# EAGLE board řídicí deska (EAGLE 9.5.1)
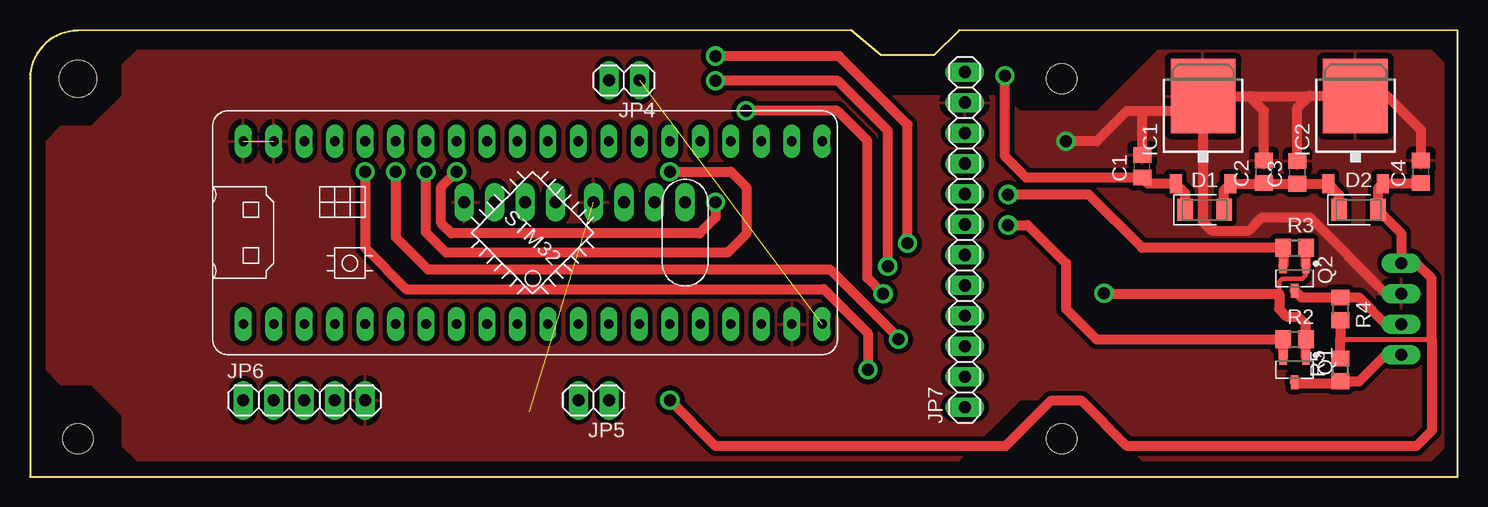
[diagram p0: board, top side]
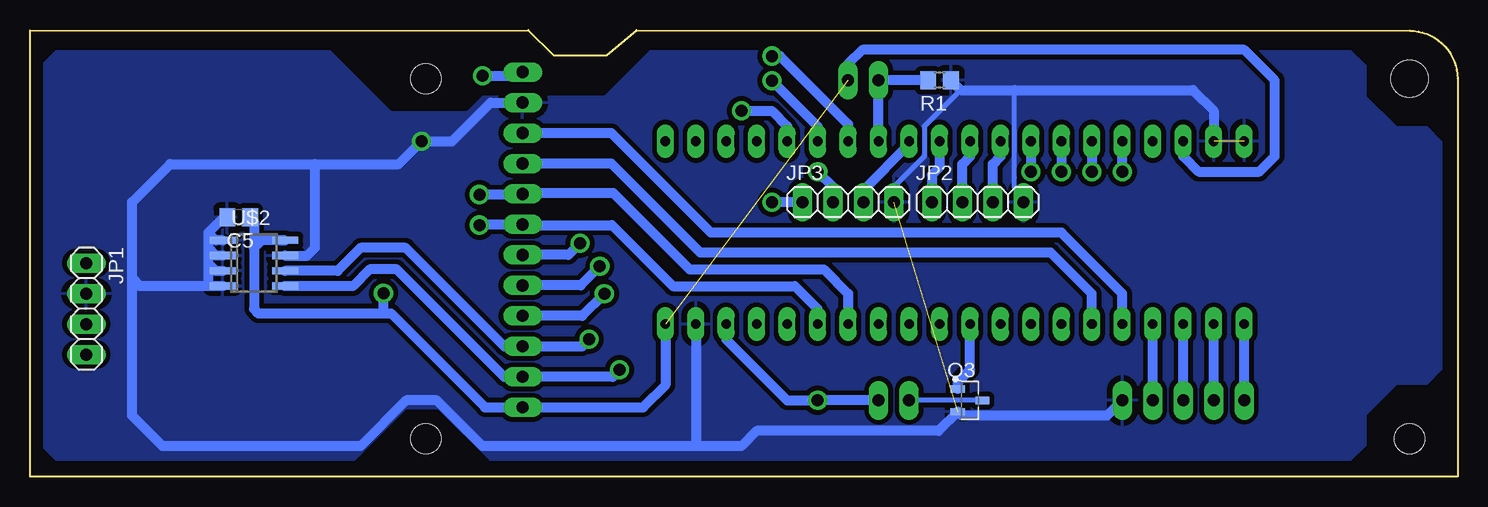
[diagram p1: board, bottom side, seen from below]

Size 119 x 37.21 mm. Coordinates in mm from the lower left corner, seen from the top.
Outline: 4,37.15 arc90 0,33.15 0,0 119,0 119,37.15 77.47,37.21 75.37,35.12 70.93,35.12 68.45,37.21 4,37.15
Copper layers (1*16): Top 0.035mm / dielectric 1.5mm / Bottom 0.035mm
Design rules "SPS_Trutnov_F14": minimum track width 0.3mm, minimum drill 0.6mm, track to track 8mil, track to pad 0.2mm, pad to pad 0.2mm, via to via 0.2mm, smd to smd 0mil, copper to edge 1mm, drill to drill 0.6mm, minimum pad ring 0.3mm, minimum via ring 0.3mm, stop-mask expansion 0.1mm, vias tented up to drill 3mm, thermal gap 20mil
Holes 3.1 mm at 4,33.15
Holes 2.5 mm at 86,33.15 86,3.15 4,3.15

## Footprints (pad centres in the part's own frame; a part is rotated, then mirrored left to right if it is on the bottom)
C0805 = smd 1.3 x 1.5: 1 -0.95,0; 2 0.95,0
DIOMELF3516 = smd 1.275 x 1.85: 1 -1.62,0; 2 1.62,0
DPACK_3 = smd 1 x 1.6: 1 -2.28,-4.8; 3 2.28,-4.8 | smd 5.4 x 6.2: 4 0,2.5
1X04 = drill 1.016 long: 1 -3.81,0; 2 -1.27,0; 3 1.27,0; 4 3.81,0
1X02 = drill 1.016 long: 1 -1.27,0; 2 1.27,0
1X05 = drill 1.016 long: 1 -5.08,0; 2 -2.54,0; 3 0,0; 4 2.54,0; 5 5.08,0
1X12 = drill 1.016 long: 1 -13.97,0; 2 -11.43,0; 3 -8.89,0; 4 -6.35,0; 5 -3.81,0; 6 -1.27,0; 7 1.27,0; 8 3.81,0; 9 6.35,0; 10 8.89,0; 11 11.43,0; 12 13.97,0
SOT95P240X110-3N = smd 1.182 x 0.612: 1 -1.025,0.95; 2 -1.025,-0.95; 3 1.025,0
R0805 = smd 1.3 x 1.5: 1 -0.95,0; 2 0.95,0
BLUE_PILL = drill 0.8 long: P$1 -7.62,15.24; P$2 -7.62,12.7; P$3 -7.62,10.16; P$4 -7.62,7.62; P$5 -7.62,5.08; P$6 -7.62,2.54; P$7 -7.62,0; P$8 -7.62,-2.54; P$9 -7.62,-5.08; P$10 -7.62,-7.62; P$11 -7.62,-10.16; P$12 -7.62,-12.7; P$13 -7.62,-15.24; P$14 -7.62,-17.78; P$15 -7.62,-20.32; P$16 -7.62,-22.86; P$17 -7.62,-25.4; P$18 -7.62,-27.94; P$19 -7.62,-30.48; P$20 -7.62,-33.02; P$21 7.62,15.24; P$22 7.62,12.7; P$23 7.62,10.16; P$24 7.62,7.62; P$25 7.62,5.08; P$26 7.62,2.54; P$27 7.62,0; P$28 7.62,-2.54; P$29 7.62,-5.08; P$30 7.62,-7.62; P$31 7.62,-10.16; P$32 7.62,-12.7; P$33 7.62,-15.24; P$34 7.62,-17.78; P$35 7.62,-20.32; P$36 7.62,-22.86; P$37 7.62,-25.4; P$38 7.62,-27.94; P$39 7.62,-30.48; P$40 7.62,-33.02
SO8 = smd 0.6 x 2.2: 1 -1.905,-2.6; 2 -0.635,-2.6; 3 0.635,-2.6; 4 1.905,-2.6; 5 1.905,2.6; 6 0.635,2.6; 7 -0.635,2.6; 8 -1.905,2.6

## Placement (x,y rotation side)
C1  100n  [C0805]  92.71,25.86 90 top
C2  100n  [C0805]  102.87,25.4 90 top
C3  100n  [C0805]  105.66,25.35 90 top
C4  100n  [C0805]  115.95,25.4 90 top
C5  10n  [C0805]  101.6,21.59 180 bottom
D1  LL4148-GS08  [DIOMELF3516]  97.92,22.23 0 top
D2  LL4148-GS08  [DIOMELF3516]  110.74,22.23 0 top
IC1  MC78M12ACDTG  [DPACK_3]  97.79,29.21 0 top
IC2  AZ1117CD5  [DPACK_3]  110.49,29.21 0 top
JP1  PINHD-1X4  [1X04]  114.3,13.97 270 bottom
JP2  PINHD-1X4  [1X04]  40.01,22.86 0 bottom
JP3  PINHD-1X4  [1X04]  50.8,22.86 0 bottom
JP4  PINHD-1X2  [1X02]  49.53,33.02 180 top
JP5  PINHD-1X2  [1X02]  46.99,6.35 180 top
JP6  PINHD-1X5  [1X05]  22.86,6.35 0 top
JP7  PINHD-1X12  [1X12]  77.93,19.74 90 top
Q1  NX3008  [SOT95P240X110-3N]  105.41,8.89 270 top
Q2  NX3008  [SOT95P240X110-3N]  105.41,16.51 270 top
Q3  NX3008  [SOT95P240X110-3N]  40.64,6.35 0 bottom
R1  10K  [R0805]  43.18,33.02 180 bottom
R2  5K  [R0805]  105.41,11.43 0 top
R3  5K  [R0805]  105.41,19.05 0 top
R4  5K  [R0805]  109.22,13.97 270 top
R5  5K  [R0805]  109.22,8.89 90 top
U$1  [BLUE_PILL]  33.02,20.32 90 top
U$2  M24CXX  [SO8]  100.33,17.78 270 bottom

## Library data of the parts
C1-C5 = rcl; SPICEPREFIX: C
D1 D2 = Diode; CATEGORY: Diode; DESCRIPTION: DIODE GEN PURP 75V 300MA SOD80; MANUFACTURER: Vishay Semiconductor Diodes Division; SUB-CATEGORY: Rectifier
IC1 IC2 = linear
JP1-JP7 = Connector; CATEGORY: CONNECTOR; SUB-CATEGORY: PIN-HEADER
Q1-Q3 = NEXPERIA
R1-R5 = rcl; SPICEPREFIX: R
U$1 = BluePill
U$2 = eeprom

## Nets
+3V3: C5.1 JP4.1 JP7.1 Q1.1 Q2.1 R2.2 R3.2 U$1.P$20 U$1.P$23 U$2.8
+5V: C4.1 D2.2 IC2.3 JP1.1 JP5.1 R4.2 R5.2 U$1.P$18
+12V: C2.1 C3.1 D1.2 D2.1 IC1.3 IC2.1
+24V: C1.1 D1.1 IC1.1 JP7.12
GND: C1.2 C2.2 C3.2 C4.2 C5.2 IC1.4 IC2.4 JP1.2 JP2.4 JP3.4 JP6.5 JP7.11 Q3.2 R1.1 U$1.P$19 U$1.P$21 U$1.P$22 U$2.1 U$2.2 U$2.3 U$2.4 U$2.7
N$5: JP5.2 Q3.3
N$6: JP1.3 Q2.3 R4.1
N$7: JP1.4 Q1.3 R5.1
PA0: JP7.4 U$1.P$36
PA1: JP7.5 U$1.P$35
PA2: JP7.6 U$1.P$34
PA3: JP4.2 R1.2 U$1.P$33
PA4: JP3.3 U$1.P$32
PA5: JP2.1 U$1.P$31
PA6: JP2.2 U$1.P$30
PA7: JP2.3 U$1.P$29
PA8: JP7.10 U$1.P$5
PA9: JP7.9 U$1.P$6
PA15: Q3.1 U$1.P$10
PB0: JP3.1 U$1.P$28
PB1: JP3.2 U$1.P$27
PB12: JP6.1 U$1.P$1
PB13: JP6.2 U$1.P$2
PB14: JP6.3 U$1.P$3
PB15: JP6.4 U$1.P$4
SCL: JP7.8 Q2.2 R3.1 U$1.P$14
SCL2: JP7.3 U$1.P$26 U$2.6
SDA: JP7.7 Q1.2 R2.1 U$1.P$15
SDA2: JP7.2 U$1.P$25 U$2.5

## Tracks (layer width: path | path; a pad name or v marks a point on that pad's centre or on a via)
+3V3  (via drill 1)  (1 unrouted)
  Top 0.356: 104.14,15.24 104.14,16.21 104.39,16.47 106.05,16.47 106.36,16.77 Q2.1
  Top 0.406: 106.36,19.37 R3.2
  Top 0.813: Q1.1 R2.2 106.36,12.7 105.72,13.34 104.78,13.34 104.14,13.97 104.14,15.24 90.21,15.24 90.17,15.28 v89.53,15.28 | Q2.1 R3.2
  Bottom 0.813: U$1.P$20 66.04,7.62 67.89,5.77 JP7.1 81.07,5.77 88.9,13.6 89.53,13.6 | U$1.P$23 22.86,26.67 21.59,25.4 16.51,25.4 15.24,26.67 15.24,33.02 17.78,35.56 49.62,35.56 50.8,34.38 JP4.1 | 89.53,13.6 v89.53,15.28 | 100.33,19.05 99.69,19.68 U$2.8 98.11,19.68 | 100.33,19.05 100.33,13.97 99.96,13.6 89.53,13.6 | C5.1 100.33,21.27 100.33,19.05
+5V  (via drill 1)
  Top 0.406: 109.22,11.43 116.84,11.43
  Top 0.813: R5.2 109.22,11.43 R4.2 | C4.1 115.91,24.41 IC2.3 112.36,24 D2.2 114.3,20.29 JP1.1 115.57,17.78 116.84,16.51 116.84,11.43 116.84,3.81 115.57,2.54 91.44,2.54 87.67,6.31 85.09,6.31 81.32,2.54 57.15,2.54 v53.34,6.35
  Bottom 0.813: JP5.1 v53.34,6.35 55.88,6.35 60.96,11.43 U$1.P$18
+12V
  Top 0.813: D2.1 109.12,23.5 IC2.1 C3.1 102.92,24.4 C2.1 102.83,24.41 IC1.3 99.54,23.88 D1.2
+24V  (via drill 1)
  Top 0.813: D1.1 96.3,23.62 IC1.1 93.21,24.41 C1.1 83.04,24.91 81.28,26.67 v81.28,33.4
  Bottom 0.813: v81.28,33.4 78.23,33.4 JP7.12
GND  (via drill 1)  (2 unrouted)
  Top 0.813: 108.23,31.71 IC2.4 111.76,31.71 | IC1.4 97.79,31.43 | JP1.2 113.03,15.24 106.68,21.59 102.7,21.59 101.6,20.49 98.54,20.49 97.79,21.24 IC1.4 | 97.84,31.66 IC1.4 | 92.71,30.48 91.44,30.48 88.9,27.94 v86.36,27.94 | 92.71,30.48 96.52,30.48 97.79,31.75 IC1.4 | C4.2 115.95,28.89 113.13,31.71 111.76,31.71 | C1.2 92.71,30.48 | C2.2 102.87,30.48 101.64,31.71 | IC1.4 101.64,31.71 | C3.2 105.66,30.73 106.64,31.71 | 111.76,31.71 111.72,31.75 106.68,31.75 106.64,31.71 | 101.64,31.71 106.64,31.71
  Bottom 0.406: JP3.4 46.99,24.13 44.45,26.67 44.45,29.21 41.45,32.21 41.42,32.21 | JP2.4 36.2,23.33 36.92,24.05 36.92,32.21
  Bottom 0.813: U$1.P$22 20.32,30.48 22.05,32.21 36.92,32.21 41.42,32.21 R1.1 | JP6.5 29.21,5.08 41.34,5.08 Q3.2 43.26,3.81 58.42,3.81 59.69,2.54 63.5,2.54 | JP7.11 80.59,31.17 83.82,27.94 v86.36,27.94 88.27,26.04 95.25,26.04 | 63.5,2.54 81.28,2.54 85.09,6.35 87.63,6.35 91.44,2.54 107.95,2.54 110.49,5.08 110.49,16.51 | 110.49,16.51 110.49,22.86 107.31,26.04 95.25,26.04 | U$2.4 104.14,15.88 | 104.14,15.88 109.86,15.88 110.49,16.51 | 104.14,20.32 104.14,19.05 | 104.14,19.05 104.14,17.78 | 104.14,17.78 103.5,17.14 U$2.3 | U$2.2 103.5,18.41 104.14,19.05 | U$2.1 103.5,19.68 104.14,20.32 | 104.14,17.78 104.14,15.88 | C5.2 102.87,21.59 104.14,20.32 | U$2.7 95.89,18.41 95.25,19.05 95.25,26.04 | U$1.P$19 63.5,2.54
  pour Top (isolate 0.406): 82.51,6.41 82.53,6.43 87.65,6.43 87.67,6.41 92.74,1.35 116.81,1.35 118.03,2.57 118.03,34.26 116.81,35.48 94.01,35.48 88.94,30.42 88.92,30.4 82.53,30.4 82.51,30.42 81.25,31.67 71.1,31.67 71.08,31.69 67.28,35.48 8.92,35.48 7.7,34.26 7.7,31.73 7.68,31.71 5.12,29.15 5.1,29.13 2.57,29.13 1.35,27.91 1.35,8.92 2.57,7.7 5.1,7.7 5.12,7.68 7.68,5.12 7.7,5.1 7.7,2.57 8.92,1.35 77.44,1.35
  pour Bottom (isolate 0.406): 84.92,5.65 84.95,5.66 87.65,5.66 87.67,5.65 91.98,1.35 116.81,1.35 118.03,2.57 118.03,34.26 116.81,35.48 94.01,35.48 88.94,30.42 88.92,30.4 82.53,30.4 82.51,30.42 81.25,31.67 71.1,31.67 71.08,31.69 67.28,35.48 8.92,35.48 7.7,34.26 7.7,31.73 7.68,31.71 5.12,29.15 5.1,29.13 2.57,29.13 1.35,27.91 1.35,8.92 2.57,7.7 5.1,7.7 5.12,7.68 7.68,5.12 7.7,5.1 7.7,2.57 8.92,1.35 80.61,1.35
N$5
  Bottom 0.406: Q3.3 JP5.2
N$6
  Top 0.813: JP1.3 113.03,12.7 110.81,14.92 R4.1 105.97,14.92 Q2.3
N$7
  Top 0.813: JP1.4 113.03,10.16 110.81,7.94 R5.1 109.07,7.79 105.48,7.79 Q1.3
PA0  (via drill 1)
  Top 0.813: v59.69,30.48 67.31,30.48 69.81,27.98 69.81,16.55 v71.12,15.24
  Bottom 0.813: U$1.P$36 55.88,29.21 57.15,30.48 v59.69,30.48 | v71.12,15.24 72.97,13.39 JP7.4
PA1  (via drill 1)
  Top 0.813: v71.5,17.53 71.5,28.83 67.35,32.98 v57.15,32.98
  Bottom 0.813: JP7.5 73.1,15.93 v71.5,17.53 | v57.15,32.98 53.34,29.17 U$1.P$35
PA2  (via drill 1)
  Top 0.813: v73.15,19.43 73.15,29.33 67.44,35.04 v57.15,35.04
  Bottom 0.813: JP7.6 74.12,18.47 v73.15,19.43 | U$1.P$34 50.8,29.37 56.47,35.04 v57.15,35.04
PA3
  Bottom 0.813: U$1.P$33 JP4.2 R1.2
PA4
  Bottom 0.813: JP3.3 49.53,23.88 45.72,27.69 U$1.P$32
PA5
  Bottom 0.813: U$1.P$31 43.18,25.78 43.81,25.15 JP2.1
PA6
  Bottom 0.813: U$1.P$30 40.64,26.67 41.27,26.04 JP2.2
PA7
  Bottom 0.813: U$1.P$29 38.1,26.67 38.73,26.04 JP2.3
PA8
  Bottom 0.813: U$1.P$5 27.94,15.24 33.02,20.32 62.23,20.32 70.54,28.63 JP7.10
PA9
  Bottom 0.813: U$1.P$6 30.48,15.24 33.91,18.67 63.12,18.67 70.54,26.09 JP7.9
PA15
  Bottom 0.813: Q3.1 41.66,7.87 40.64,8.89 U$1.P$10
PB0  (via drill 1)
  Top 0.813: v35.56,25.4 34.29,24.13 34.29,21.12 35.14,20.27 55.83,20.27 57.15,21.59 v57.15,22.86
  Bottom 0.813: U$1.P$28 v35.56,25.4 | JP3.1 v57.15,22.86
PB1  (via drill 1)
  Top 0.813: v33.02,25.4 33.02,20.32 34.67,18.67 58.17,18.67 59.73,20.23 59.73,24.09 58.42,25.4 v53.34,25.4
  Bottom 0.813: U$1.P$27 v33.02,25.4 | v53.34,25.4 52.07,24.13 JP3.2
PB12
  Bottom 0.813: JP6.1 U$1.P$1
PB13
  Bottom 0.813: JP6.2 U$1.P$2
PB14
  Bottom 0.813: JP6.3 U$1.P$3
PB15
  Bottom 0.813: JP6.4 U$1.P$4
SCL  (via drill 1)
  Top 0.813: Q2.2 R3.1 92.71,19.05 88.27,23.5 v81.53,23.5
  Bottom 0.813: U$1.P$14 50.8,15.24 52.83,17.27 64.01,17.27 70.36,23.62 78,23.62 JP7.8 78.94,23.55 78.99,23.5 v81.53,23.5
SCL2  (via drill 1)
  Top 0.813: v30.48,25.4 30.48,19.94 33.15,17.27 66.67,17.27 72.39,11.56 v72.39,11.43
  Bottom 0.813: U$1.P$26 v30.48,25.4 | v72.39,11.43 72.97,10.85 JP7.3 79.47,10.85 87.67,19.05 91.44,19.05 93.34,17.14 U$2.6
SDA  (via drill 1)
  Top 0.813: v81.53,20.95 83.19,20.95 86.36,17.78 86.36,13.97 88.9,11.43 R2.1 Q1.2
  Bottom 0.813: U$1.P$15 53.34,13.97 55.24,15.88 65.41,15.88 70.48,20.95 77.88,20.95 JP7.7 81.48,21.01 v81.53,20.95
SDA2  (via drill 1)
  Top 0.813: v27.94,25.4 27.94,19.05 31.37,15.62 66.17,15.62 69.85,11.94 v69.85,8.89
  Bottom 0.813: v27.94,25.4 U$1.P$25 | v69.85,8.89 70.43,8.31 JP7.2 79.47,8.31 88.43,17.27 90.68,17.27 92.08,15.88 U$2.5